# Altium PCB Plate.PcbDoc (part 2 of 2)
Units mm, origin at the board's own origin, x right, y up, seen from the top; angles counter-clockwise.
Board outline 61.6 x 65.4 mm, 4 copper layers (Top Layer, MID1, MID2, Bottom Layer), stack 1.082 mm thick; 79 components, 55 nets, 335 pads, 121 vias.
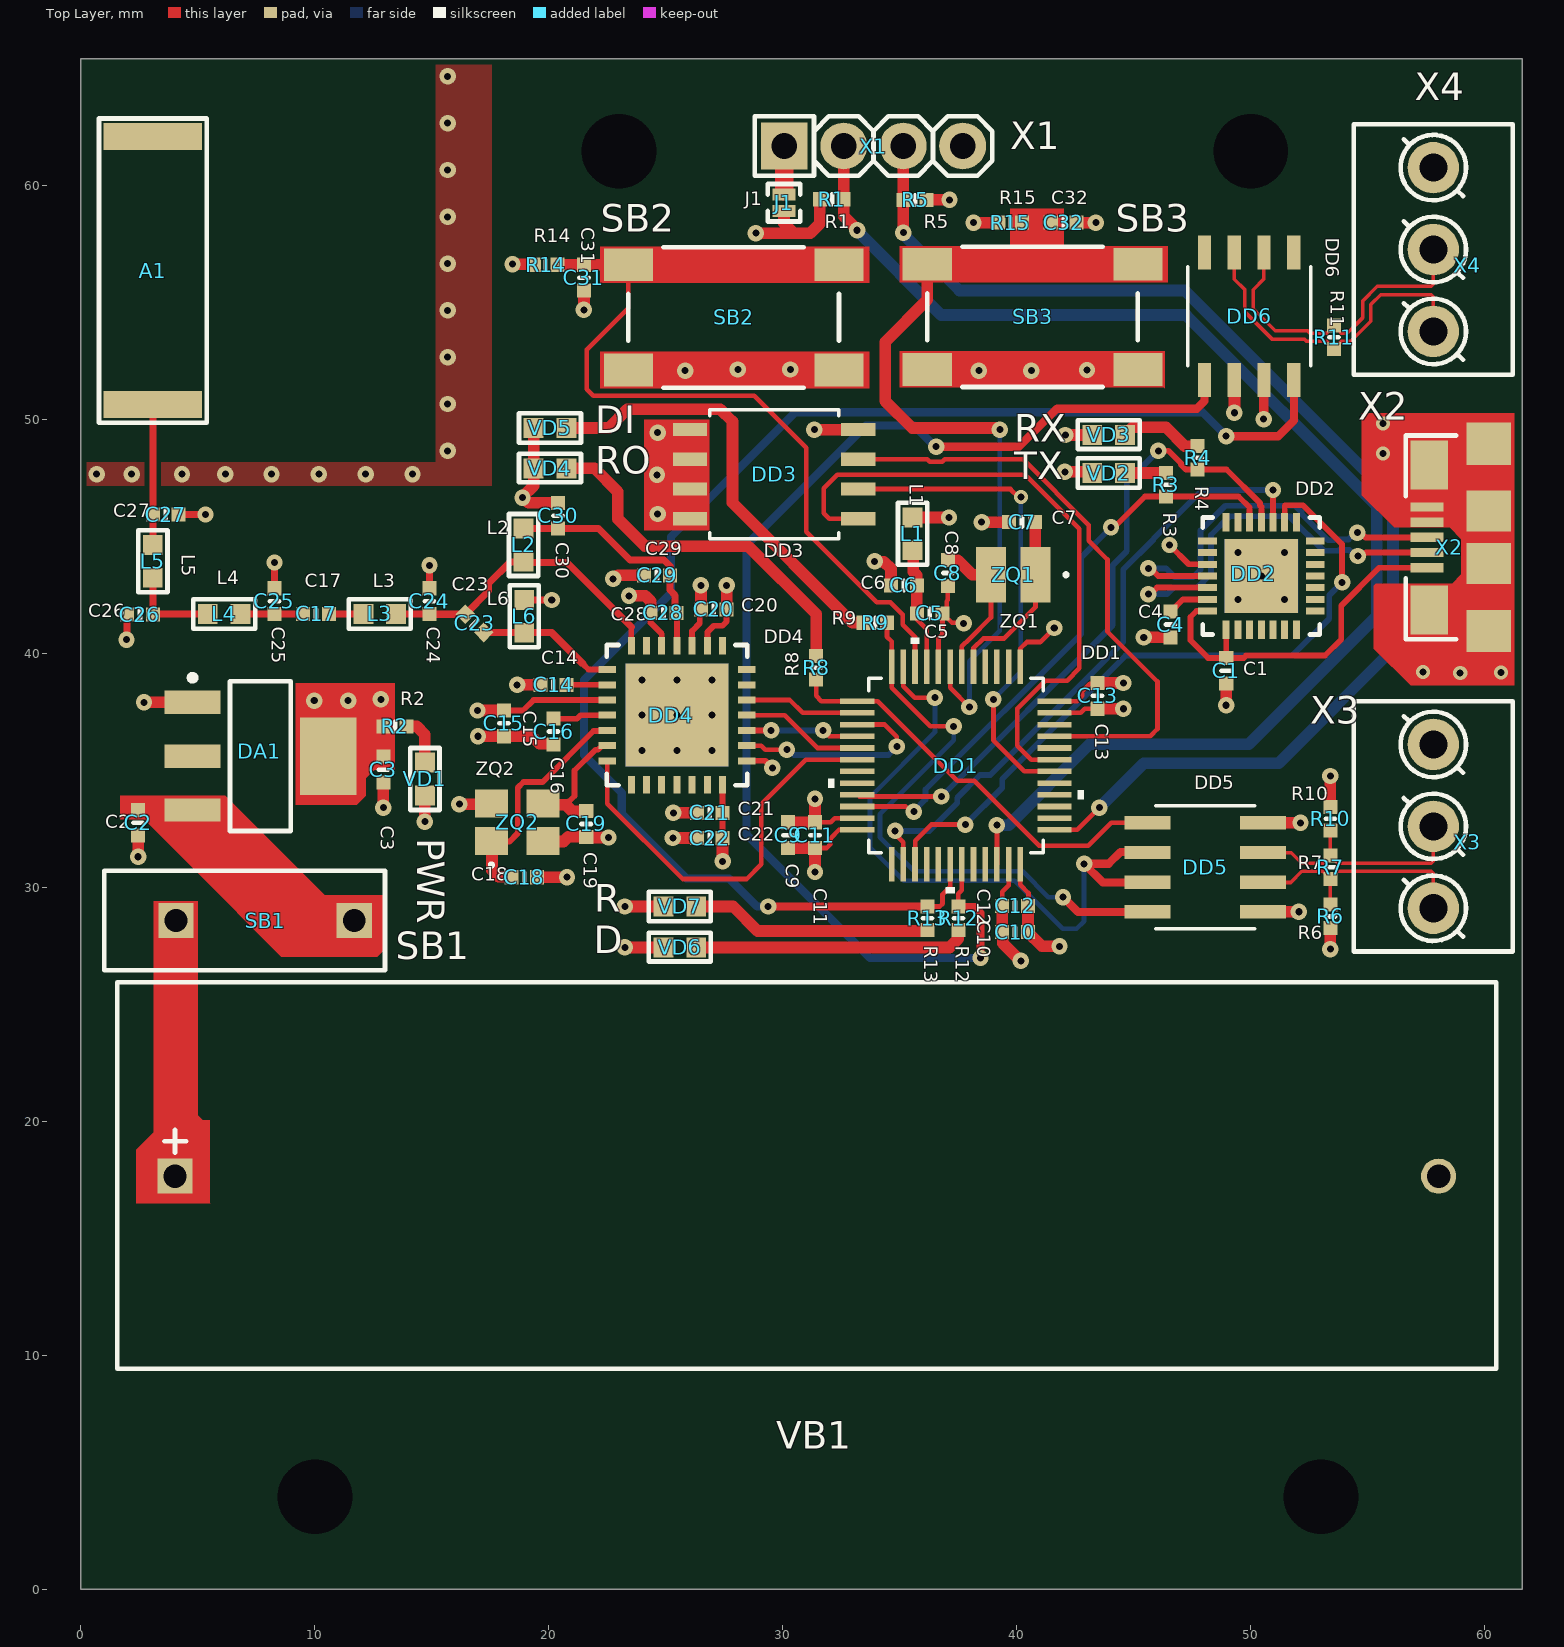
[diagram p0: Top Layer view]

## Via types
v1: diameter 0.7, hole 0.3, Top Layer to Bottom Layer, tented both sides, 115 vias
v2: diameter 0.6, hole 0.3, Top Layer to Bottom Layer, 5 vias
v3: diameter 0.6, hole 0.3, Top Layer to Bottom Layer, tented both sides, 1 vias

## Nets (pads, with @x,y where several pads share a name; then routed paths per layer and width w, separated by ;. In a path a pad name is that pad's centre, name@x,y a point inside that pad or via, vN(x,y) a via of type N, cw(c..) or ccw(c..) an arc to the next point about the centre after c; other vN are vias at no path point) (continued)
pads on no net: A1.2 DA1. DA1.2 DD1.2 DD1.3 DD1.4 DD1.19 DD1.20 DD1.25 DD1.28 DD1.29 DD1.32 DD1.33 DD1.38 DD1.39 DD1.40 DD1.41 DD1.44 DD1.46 DD2. DD2.1 DD2.2 DD2.9 DD2.10 DD2.11 DD2.12 DD2.13 DD2.14 DD2.15 DD2.16 DD2.17 DD2.18 DD2.19 DD2.20 DD2.21 DD2.22 DD2.27 DD2.28 DD4. DD4.8 DD4.9 DD4.10 DD4.11 DD4.12 DD4.13 DD4.20 DD4.21 DD4.22 DD4.27 DD6.5 DD6.8 X2. X3. X4.

## Polygon pours and split planes (outlines as drawn)
GND on Top Layer "GND2" (solid, pour order 56): 15.175,63.145 15.175,65.4 17.55,65.4 17.55,63.145
GND on Top Layer "GND2" (solid, pour order 48): 2.925,48.15 2.925,47.15 0,47.15 0,48.15
GND on Top Layer "GND2" (solid, pour order 42): 3.225,48.15 15.175,48.15 15.175,47.15 3.225,47.15
no net on Top Layer "GND" (solid, pour order 24): 0,48.15
GND on Top Layer "GND_PROTECT3" (solid, pour order 14): 15.175,47.15 17.55,47.15 17.55,63.4 15.175,63.4
GND on Top Layer "GND_PROTECT3" (solid, pour order 12): 15.175,48.15
GND on MID1 "GND" (solid, pour order 58): 0,48.15 15.175,48.15 15.175,65.4 61.6,65.4 61.6,0 0,0
+3.3V on MID2 "3V3" (solid, pour order 60): 0,48.15 15.175,48.15 15.175,65.4 61.6,65.4 61.6,0 0,0

## Other copper
Top Layer:
  region net GND: 61.25,50.25 54.75,50.25 54.75,46.75 56.125,45.375 58.5,45.375 59,44.875 59,43.375 58.6,42.975 55.35,42.975 55.25,42.875 55.25,40.2 56.825,38.625 61.25,38.625
  region net GND: 61.25,50.125
  region net GND: 61.25,50.05
  region net GND: 61.6,50.05
  region net NRST: 39.725,59 42,59 42,57.4 39.725,57.4
  region: 48.875,44.875
  region net GND: 22.2,52.875 33.7,52.875 33.7,51.325 22.2,51.325
  region net WKUP: 22.2,57.375 33.7,57.375 33.7,55.825 22.2,55.825
  region net NRST: 35,57.4 46.45,57.4 46.45,55.85 35,55.85
  region net GND: 35,52.9 46.325,52.9 46.325,51.325 46.275,51.375 35,51.375
  region net NetSB1_1: 5,29.4 3.125,29.4 3.125,19.525 2.375,18.775 2.375,16.5 5.525,16.5 5.5,16.525 5.5,20.05 5.2,20.05 5,20.25
  region net GND: 24.075,49.975 26.85,49.975 26.85,45.25 24.075,45.25
  region net NetC2_2: 1.675,33.9 6.175,33.9 10.425,29.65 12.925,29.65 12.925,27.275 12.675,27.025 8.575,27.025 4.775,30.825 2.7,32.9 1.675,32.9
  region net +3.3V: 9.175,38.725 13.425,38.725 13.425,35.025 12.55,35.025 12.175,34.65 12.175,33.9 11.8,33.525 9.175,33.525
MID1:
  pour cut-out: 8,5.95 12,5.95 12,1.95 8,1.95
  pour cut-out: 51,6 54.875,6 54.875,2 51,2
  pour cut-out: 48,63.45 52,63.45 52,59.45 48,59.45
  pour cut-out: 28.5,63.375 36.425,63.375 36.425,60.125 28.5,60.125
  pour cut-out: 21,63.45 25,63.45 25,59.45 21,59.45
  pour cut-out: 28.865,62.875
  pour cut-out: 28.865,62.875
  region net GND: 36.35,62.95
Bottom Layer:
  region net GND: 48.875,44.875 52.025,44.875 52.025,41.725 48.875,41.725
  region net GND: 23.275,39.55 27.675,39.55 27.675,35.15 23.275,35.15

## Silkscreen, mask and mechanical layers (free items; w line width, h text height)
Top Overlay:
  text "X4" at 57,63.25 h2
  text "X1" at 39.725,61.15 h2
  text "R15" at 39.25,59 h1
  text "C32" at 41.475,59 h1
  text "J1" at 28.375,58.95 h1
  text "C31" at 21.2,58.2 h1 r270
  text "R1" at 31.8,57.975 h1
  text "R5" at 36.025,57.975 h1
  text "DD6" at 53,57.75 h1 r270
  text "SB2" at 22.225,57.625 h2
  text "SB3" at 44.225,57.625 h2
  text "R14" at 19.35,57.375 h1
  text "R11" at 53.225,55.5 h1 r270
  text "X2" at 54.6,49.6 h2
  text "DI" at 21.975,49.025 h2
  text "RX" at 39.9,48.65 h2
  text "RO" at 21.975,47.275 h2
  text "L1" at 35.225,47.25 h1 r270
  text "R4" at 47.425,47.125 h1 r270
  text "TX" at 39.9,47.05 h2
  text "DD2" at 51.9,46.55 h1
  text "R3" at 46.075,46 h1 r270
  text "C27" at 1.375,45.625 h1
  text "C7" at 41.5,45.325 h1
  text "C8" at 36.75,45.225 h1 r270
  text "L2" at 17.35,44.9 h1
  text "C30" at 20.1,44.75 h1 r270
  text "L5" at 4.125,44.225 h1 r270
  text "C29" at 24.125,44 h1
  text "DD3" at 29.175,43.9 h1
  text "L4" at 5.8,42.75 h1
  text "C17" at 9.575,42.625 h1
  text "L3" at 12.475,42.625 h1
  text "C6" at 33.325,42.55 h1
  text "C23" at 15.85,42.475 h1
  text "L6" at 17.35,41.85 h1
  text "C20" at 28.225,41.575 h1
  text "C26" at 0.325,41.35 h1
  text "C4" at 45.2,41.3 h1
  text "C28" at 22.65,41.2 h1
  text "C25" at 7.975,41.125 h1 r270
  text "C24" at 14.6,41.125 h1 r270
  text "R9" at 32.1,41.025 h1
  text "ZQ1" at 39.275,40.9 h1
  text "C5" at 36.05,40.45 h1
  text "DD4" at 29.175,40.225 h1
  text "DD1" at 42.75,39.55 h1
  text "C14" at 19.675,39.325 h1
  text "R8" at 30.875,39 h1 r90
  text "C1" at 49.675,38.875 h1
  text "R2" at 13.65,37.575 h1
  text "C15" at 18.725,37.55 h1 r270
  text "C13" at 43.15,36.975 h1 r270
  text "X3" at 52.55,36.6 h2
  text "C16" at 19.9,35.55 h1 r270
  text "ZQ2" at 16.875,34.6 h1
  text "DD5" at 47.575,34 h1
  text "R10" at 51.725,33.525 h1
  text "C21" at 28.075,32.875 h1
  text "C3" at 12.625,32.625 h1 r270
  text "C2" at 1.05,32.325 h1
  text "PWR" at 14,32.1 h2 r270
  text "C22" at 28.075,31.8 h1
  text "C19" at 21.3,31.5 h1 r270
  text "C9" at 29.925,31 h1 r270
  text "R7" at 52,30.575 h1
  text "C18" at 16.675,30.075 h1
  text "C11" at 31.125,29.95 h1 r270
  text "C12" at 38.125,29.925 h1 r270
  text "R" at 21.95,28.575 h2
  text "C10" at 38.125,28.575 h1 r270
  text "R6" at 52,27.575 h1
  text "R13" at 35.85,27.5 h1 r270
  text "R12" at 37.2,27.5 h1 r270
  text "D" at 21.925,26.8 h2
  text "SB1" at 13.45,26.525 h2
Top Solder:
  region: 34.525,40.15
  region: 31.025,32.425
  region: 29.5,59.9 30.6,59.9 30.6,58.6 29.5,58.6
  region: 42.2,58.75 43.725,58.75 43.725,58.05 42.2,58.05
  region: 21.15,55.85 21.85,55.85 21.85,54.325 21.15,54.325
  region: 48.75,46.05 52.15,46.05 52.15,45.15 48.75,45.15
  region: 52.3,45 53.2,45 53.2,41.6 52.3,41.6
  region: 48.75,41.45 52.15,41.45 52.15,40.55 48.75,40.55
  region: 47.7,45 48.6,45 48.6,41.6 47.7,41.6
Bottom Solder:
  region: 48.825,44.925 52.075,44.925 52.075,41.675 48.825,41.675
  region: 23.163,39.725 27.8,39.725 27.8,35.025 23.137,35.025
Border:
  the board outline again, w0.2